# EAGLE board alim (EAGLE 7.5.0)
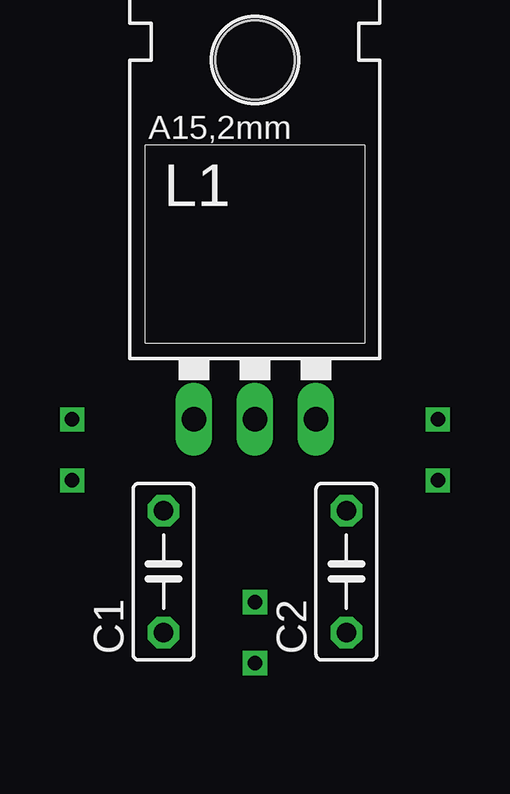
[diagram p0: board, top side]
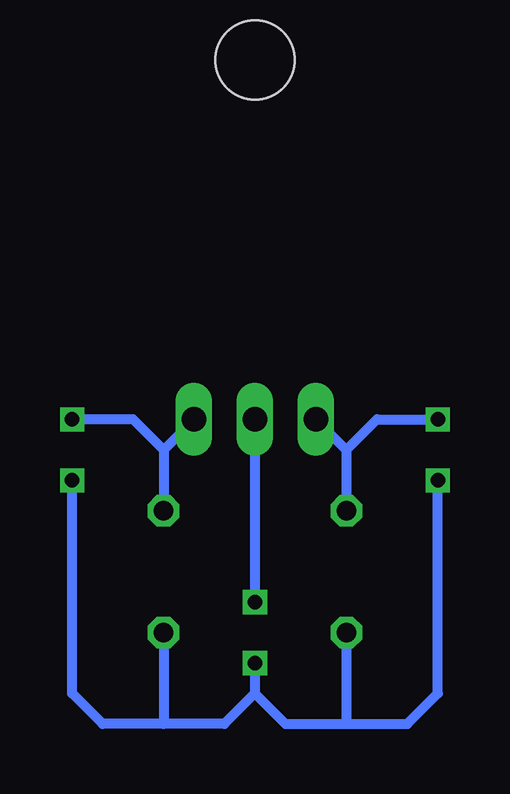
[diagram p1: board, bottom side, seen from below]

No outline drawn. Coordinates in mm, seen from the top.
Copper layers (1*16): Top 0.035mm / dielectric 1.5mm / Bottom 0.035mm
Design rules "default": minimum track width 10mil, minimum drill 0.6mm, track to track 8mil, track to pad 8mil, pad to pad 8mil, via to via 8mil, smd to smd 8mil, copper to edge 40mil, drill to drill 8mil, minimum pad ring 10mil, minimum via ring 8mil, stop-mask expansion 4mil, vias tented up to drill 0mil, thermal gap 10mil

## Footprints (pad centres in the part's own frame; a part is rotated, then mirrored left to right if it is on the bottom)
C050-025X075 = drill 0.813 octagon: 1 -2.54,0; 2 2.54,0
78XXL = drill 1.016 long: GND 0,-3.81; IN -2.54,-3.81; OUT 2.54,-3.81 | hole 3.302: 0,11.176

## Placement (x,y rotation side)
C1  100 nF  [C050-025X075]  68.58,35.56 90 top
C2  100 nF  [C050-025X075]  76.2,35.56 90 top
L1  [78XXL]  72.39,45.72 0 top

## Library data of the parts
C1 C2 = resistor
L1 = v-reg

## Nets
S$1: C1.2 L1.IN
S$2: C2.2 L1.OUT
S$4: C1.1 C2.1
S$5: L1.GND

## Tracks (layer width: path | path; a pad name or v marks a point on that pad's centre or on a via)
S$1  (via drill 0.6)
  Bottom 0.406: L1.IN 68.58,40.64 | 68.58,40.64 C1.2 | 68.58,40.64 67.31,41.91 v64.77,41.91
S$2  (via drill 0.6)
  Bottom 0.406: L1.OUT 76.2,40.64 | 76.2,40.64 C2.2 | 76.2,40.64 77.47,41.91 v80.01,41.91
S$4  (via drill 0.6)
  Bottom 0.406: 72.39,30.48 71.12,29.21 68.58,29.21 | 68.58,29.21 66.04,29.21 64.77,30.48 v64.77,39.37 | C1.1 68.58,29.21 | 72.39,30.48 73.66,29.21 76.2,29.21 | 76.2,29.21 78.74,29.21 80.01,30.48 v80.01,39.37 | C2.1 76.2,29.21 | v72.39,31.75 72.39,30.48
S$5  (via drill 0.6)
  Bottom 0.406: L1.GND v72.39,34.29